# Altium PCB MCORD_AFE.PCBDOC (part 2 of 3)
Units mil, origin at the board's own origin, x right, y up, seen from the top; angles counter-clockwise.
Board outline 2755.91 x 787.4 mil, 4 copper layers (TOP, G1, PWR, BOT), stack 58.685 mil thick; 115 components, 78 nets, 421 pads, 239 vias.
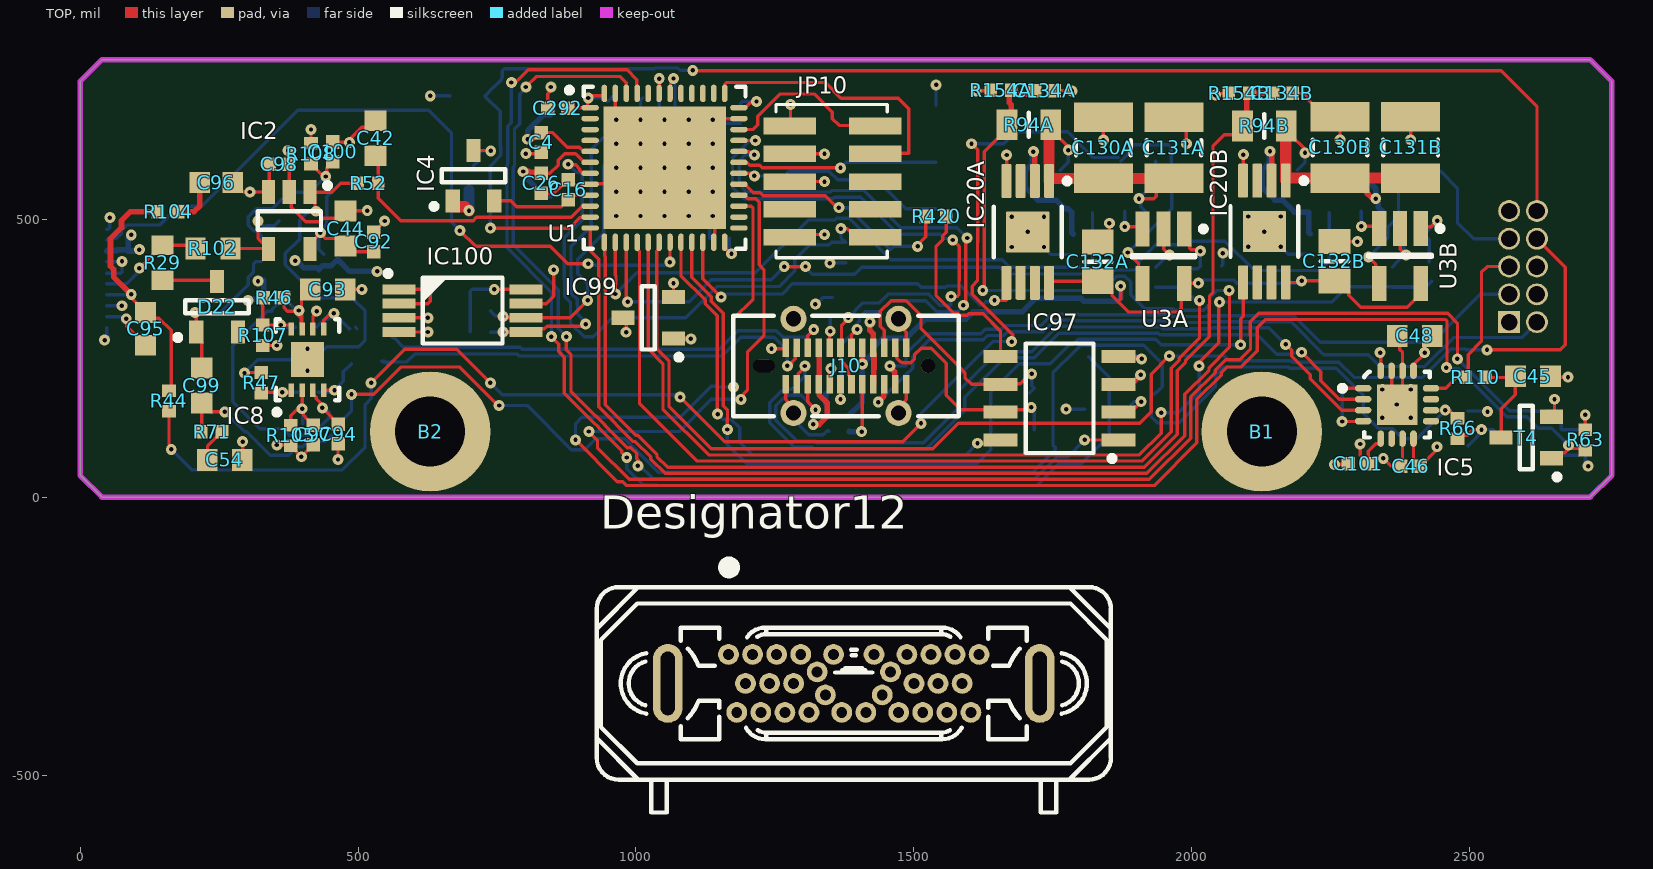
[diagram p0: TOP view]

## Via types
v1: diameter 19.68, hole 7.87, TOP to BOT, tented both sides, 239 vias

## Nets (pads, with @x,y where several pads share a name; then routed paths per layer and width w, separated by ;. In a path a pad name is that pad's centre, name@x,y a point inside that pad or via, vN(x,y) a via of type N, cw(c..) or ccw(c..) an arc to the next point about the centre after c; other vN are vias at no path point) (continued)
CAL0_N: (continued)
  TOP w6: J10.A10@1309.06,203.54 1309.06,172.12 1323,158.17 v1(1323,157.59) ; v1(2169,275) 2179.74,264.26 2179.74,253.4 2213.25,219.89 2213.25,212.91 2269.57,156.59 IC5.3@2308.39,156.59
  BOT w6: v1(1323,157.59) 1297.39,183.2 1270.37,183.2 1251.84,164.67 1251.84,138.48 1289.16,101.16 1321.76,101.16 1325.02,97.91 1517.39,97.91 1580.44,160.95 1580.44,191.47 1650.81,261.84 1712.11,261.84 1758,307.73 1785.9,307.73 1787.4,306.24 1944.01,306.24 1947.09,303.16 2035.06,303.16 2036.52,304.62 2138.66,304.62 2168.28,275 v1(2169,275)
CAL0_P: IC5.2 J10.A11 | length 1424.6
  TOP w6: J10.A11@1289.37,203.54 1292.28,206.45 1292.28,222.13 1303.87,233.72 v1(1303.87,236.12) ; v1(2197.58,260.79) 2232.27,226.11 2232.27,209.45 2265.44,176.27 IC5.2@2308.39,176.27
  BOT w6: v1(1303.87,236.12) 1303.87,218.04 1280.02,194.2 1265.81,194.2 1262.08,190.46 1261.22,190.46 1240.84,170.09 1240.84,133.92 1284.61,90.16 1317.21,90.16 1320.46,86.91 1521.94,86.91 1584.99,149.95 1585.26,149.95 1591.7,156.4 1591.7,179.41 1663.13,250.84 1716.67,250.84 1761.07,295.24 1939.45,295.24 1942.53,292.16 2117.59,292.16 2152.59,257.16 2176.39,257.16 2178.74,259.51 2196.3,259.51 v1(2197.58,260.79)
CAL_IN: IC5.12 J2.5 R110.2 | length 325.1
  TOP w6: IC5.12@2430.44,195.96 2457.06,195.96 2475,213.9 2490.36,213.9 R110.2@2491.9,215.43 2497.21,220.75 2497.21,256.32 2521.18,280.29 2521.18,404.87 2531.28,414.96 J2.5@2571,414.96
CAN_H: D121.1 IC97.7 J10.B11 | length 388.6
  TOP w6: J10.B11@1466.54,268.9 1469.44,265.99 1469.44,250.31 1471.32,248.44 1476.59,243.17 1478.18,243.17 1479.54,241.81 1494.49,241.81 1501.13,248.44 1501.13,256.2 1512.92,267.99 1531.22,267.99 1558.53,240.68 1558.53,183.13 1584.28,157.38 1655.84,157.38 1703.21,157.38 1704.94,159.11 1705.18,159.11 v1@1706.91,157.38
  BOT w6: D121.1@1716.86,120.95 1716.86,152.42
  other v1: 1711.26,161.73
CAN_L: D121.2 IC97.6 J10.B10 | length 476.5
  TOP w6: J10.B10@1446.85,268.9 1446.85,300.32 1439.82,307.35 1439.82,334.38 1458.93,353.49 1485.95,353.49 1512.92,326.52 1512.92,303.26 1570.53,245.65 1570.53,245.6 1581.57,234.56 1581.62,234.56 1592,224.18 1592,214.85 1603.81,203.03 IC97.6@1655.84,203.03 1656.65,203.84 1691.84,203.84 1710,222 v1(1712,222)
  BOT w6: D121.2@1708.05,186.94 D121.2@1716.86,195.75 1712,200.61 v1@1712,220
CAN_MOD: IC97.8 U1.20 | length 902.2
  TOP w6: U1.20@1081.05,458.71 1081.05,398.29 1124.46,354.88 1124.46,348.19 1146.35,326.3 1146.35,150.07 v1(1146.94,149.48) ; v1(1614.5,97.11) 1649.92,97.11 IC97.8@1655.84,103.03
  BOT w6: v1(1146.94,149.48) 1147.34,149.48 1157.1,139.71 1171.88,139.71 1186.81,124.78 1186.81,99.12 1210.03,75.91 1593.3,75.91 v1(1614.5,97.11)
CAN_MOD2: R420.2 U1.29 | length 432.9
  TOP w6: U1.29@1185.38,563.04 1196.2,563.04 1211.24,548 1223.32,548 1229.25,542.08 1340.59,542.08 1362.08,520.59 1364.59,520.59 v1(1365,521) ; v1(1506.86,451.43) 1506.86,453.93 1521.5,468.56 R420.2@1521.5,505.06
  BOT w6: v1(1365,521) 1381.97,521 1457.71,445.26 1463.87,451.43 v1(1506.86,451.43)
CAN_RX: R416.2 U1.45 | length 2128.8
  TOP w6: v1(776,746) 778.62,748.62 785.97,748.62 806.2,768.84 984.09,768.84 1001.57,751.36 1001.57,727.16 U1.45@1002.31,726.43 ; v1(848,289) 848,288.13 860.89,275.24 860.89,262.13 871.16,251.86 871.16,186.91 922.11,135.95 922.74,135.95 933.2,125.5 933.2,124.87 974.52,83.54 974.52,80.31 v1(983.49,71.34)
  BOT w6: v1@778.65,742.32 776,739.68 776,674 769.63,667.62 769.63,599.42 768.16,597.95 768.16,448.36 848,368.52 v1(848,289) ; v1(983.49,71.34) 983.49,51.35 1012.85,22 1036.6,22 1037.6,21 1721.28,21 1760.47,60.19 1801.19,60.19 1851.79,110.79 1851.79,156.21 ; R416.2@1814.79,253.03 1814.79,252.24 1823.2,243.83 1823.99,243.83 1851.79,216.02 1851.79,156.21 ; 1852,156 1851.79,156.21
CAN_TX: IC97.1 U1.46 | length 1914.1
  TOP w6: v1(802,738) 820.84,756.84 971.57,756.84 982.62,745.79 U1.46@982.62,726.43 ; v1(874.75,289) 874.75,265.24 883.16,256.83 883.16,190.46 926.67,146.95 927.3,146.95 944.2,130.06 944.2,129.42 984.44,89.19 990.88,89.19 1001.34,78.73 1001.34,69.06 1009,61.39 1004.12,56.51 v1(1003.57,56.51) ; v1(1807.42,103.03) IC97.1@1868.44,103.03
  BOT w6: v1(802,738) 802,736.18 790.76,724.94 790.76,671.78 781.63,662.65 781.63,595.86 779.16,593.39 779.16,454.33 860,373.49 860,303.75 v1(874.75,289) ; v1(1003.57,56.51) 1003.57,60.23 1030.8,33 1717.72,33 1756.91,72.19 1776.57,72.19 v1(1807.42,103.03)
DC_LEVEL_MEAS0: C42.2 R52.1 U1.10 | length 486.8
  TOP w6: C42.2@534,615 536.5,612.5 R52.1@536.5,564.82 536.5,538.13 577.16,497.47 690.69,497.47 ; 690.72,497.44 707.06,497.44 713.09,503.47 883.2,503.47 903.4,523.67 U1.10@917.66,523.67
DC_LEVEL_MEAS1: C43.2 J2.10 U1.11 | length 2584.6
  TOP w6: v1(738,484) 880.7,484 899.95,503.25 916.93,503.25 U1.11@917.66,503.98 ; v1(1102.25,768) 1102.95,767.3 2556.7,767.3 2621,703 J2.10@2621,514.96
  BOT w6: v1(738,484) 738,595.78 756.11,613.89 756.11,615.3 756.63,615.82 756.63,630.6 756.11,631.12 756.11,693.95 745.25,704.82 744.26,704.82 728.56,720.52 C43.2@728.56,721.5 728.56,722.49 744.26,738.19 745.25,738.19 758.16,751.1 758.16,753.39 759.69,754.92 759.69,767.26 763.26,770.84 1033.19,770.84 1034.45,772.1 1075.49,772.1 1079.59,768 v1(1102.25,768)
DET_OUT0_N: J10.B3 R103.2 | length 854.2
  TOP w6: J10.B3@1309.06,268.9 1309.06,290.65 1316.09,297.68 v1@1316.09,307.35
  BOT w6: R103.2@547.19,304.22 R103.2@547.38,304.4 ; R103.2@548.14,303.26 548.14,301.29 562.86,286.58 564.83,286.58 581.82,269.58 791.83,269.58 795.42,266 1149.69,266 1183.43,299.74 1252.25,299.74 1263.74,288.24 1306.46,288.24 1319.69,301.47 v1(1319.88,301.47)
DET_OUT0_P: J10.B2 R48.2 | length 842.7
  TOP w6: v1(1272.5,236.32) 1278.18,236.32 1280.73,238.87 1280.73,243.17 1286.46,248.9 1286.46,265.99 J10.B2@1289.37,268.9
  BOT w6: R48.2@551.31,240.17 R48.2@548.14,243.34 ; v1(1272.5,236.32) 1272.5,263.93 1248.69,287.74 1188.4,287.74 1154.66,254 790.45,254 786.86,257.58 602.29,257.58 588.05,243.34 R48.2@548.14,243.34 ; R48.2@548.14,243.34 543.57,243.34 542.53,244.38 547.11,244.38 R48.2@548.14,243.34
DET_OUT1_N: J2.2 J10.A3 | length 1364.9
  TOP w10: v1(1436.02,170.97) 1436.02,171.75 1445.94,181.67 1445.94,202.64 J10.A3@1446.85,203.54
  BOT w6: v1(1436.02,170.97) 1489.17,224.12 1490.28,224.12 1497.81,231.65 1497.81,252.88 1528.09,283.16 1624.95,283.16 1632.79,291 1661.77,291 1668.61,297.84 1732.56,297.84 1753.45,318.73 1790.46,318.73 1791.95,317.24 1957.56,317.24 1960.64,314.16 2030.5,314.16 2031.96,315.62 2178.57,315.62 2237.81,256.38 2317.39,256.38 2338.56,235.2 2419.41,235.2 2471.49,287.28 2594,287.28 2621,314.28 J2.2@2621,314.96
DET_OUT1_P: J2.3 J10.A2 | length 1259.6
  TOP w10: v1(1456.99,236.12) 1456.99,234.06 1465.63,225.42 1465.63,204.45 J10.A2@1466.54,203.54
  BOT w6: v1(1456.99,236.12) 1485.31,236.12 1485.81,236.62 1485.81,257.85 1522.12,294.16 1620.39,294.16 1628.23,302 1657.21,302 1664.05,308.84 1728,308.84 1748.89,329.73 1795.02,329.73 1796.51,328.24 1962.12,328.24 1965.19,325.16 2025.95,325.16 2027.41,326.62 2183.13,326.62 2230.75,279 2433.03,279 2518.99,364.96 J2.3@2571,364.96
EN_CAL_PULSE0: R67.1 T5.1 U1.28 | length 2866.7
  TOP w6: v1@917,116 930.83,102.17 930.83,88.83 987.66,32 1923.96,32 1998.24,106.29 1998.24,180.37 2042.08,224.2 2042.08,228.08 2061.46,247.46 2086.46,247.46 2105.84,266.85 2105.84,290.7 2105.27,291.27 2105.27,315.62 2120.5,330.85 2460.3,330.85 2478,313.15 v1(2478,248.9) ; U1.28@1185.38,543.35 1195.29,543.35 1201.64,537 1215.59,537 1221.76,530.83 1221.76,417.78 1230.32,409.22 1230.32,290.43 1200.68,260.79 1200.68,192.65 1193.84,185.81
  BOT w6: v1(915.35,118.11) v1@915.35,119.22 ; v1@917.11,118.11 1077.86,118.11 1135.75,176 v1(1189,176) ; v1(2478,248.9) 2478,248.79 2571.01,155.78 2607.02,155.78 2608.23,154.57 2637.45,154.57 T5.1@2647.25,144.78 2655.12,144.78 2664.92,134.98 2664.92,122.32 2665.7,121.54 R67.1@2708.21,121.54
EN_CAL_PULSE1: R63.1 T4.1 U1.27 | length 2935.5
  TOP w6: v1(891.4,103.03) 966.76,27.67 976.44,27.67 983.11,21 1932.63,21 2009.24,97.61 2009.24,175.81 2053.08,219.65 2053.08,223.52 2063.93,234.38 2088.93,234.38 2117.95,263.4 2117.95,304.62 2133.18,319.85 2455.75,319.85 2459.26,316.33 2459.26,234.26 v1(2458,233) ; v1(1175.19,198.14) 1175.19,320.87 1210.76,356.43 1210.76,520.15 1207.24,523.67 U1.27@1185.38,523.67 ; T4.1@2647.25,69.97 2657.04,79.77 2671.03,79.77 2678.74,87.48 2705.26,87.48 R63.1@2708.21,84.53
  BOT w6: v1(891.4,103.03) 891.4,132.31 902.97,143.88 1080.16,143.88 1135.67,199.4 1146.35,199.4 1147.61,198.14 v1(1175.19,198.14) ; v1(2458,233) 2459.94,231.06 2480.17,231.06 2566.46,144.78 2602.47,144.78 2623.26,123.98 2647.69,123.98 v1(2678.16,93.51)
EN_HV0: IC20A.5 U1.22 | length 700.5
  TOP w6: U1.22@1120.42,458.71 1120.42,393.02 v1(1153.3,360.14) ; v1(1645.17,354) 1657.85,354 ; IC20A.5@1666.57,385.73 1666.79,385.51 IC20A.5@1666.79,362.94 ; 1657.85,354 1666.57,354 1666.79,354 IC20A.5@1666.79,362.94 ; 1657.85,354 IC20A.5@1666.79,362.94
  BOT w6: v1(1153.3,360.14) 1157,360.14 1162.35,365.49 1263,365.49 1281.36,383.85 1506.6,383.85 1512.96,377.49 1556.84,377.49 1559.2,379.84 1585.08,379.84 1618.45,346.47 1624.45,346.47 1629.36,351.38 1642.55,351.38 v1(1645.17,354)
EN_HV1: IC20B.5 U1.21 | length 1599
  TOP w6: U1.21@1100.73,458.71 1100.73,395.74 1135.46,361.01 1135.46,352.75 1157.35,330.86 1157.35,164.3 1164.78,156.87 1164.78,142.09 1164.49,141.8 v1(1164.49,121.87) ; v1(2088,274.24) 2088,321.27 2092.36,325.63 IC20B.5@2092.36,386.36
  BOT w6: v1(1164.49,121.87) 1164.49,94.79 1198.28,61 1613.81,61 1638.16,85.35 1638.16,188.39 1689.61,239.84 1745.13,239.84 1780.59,275.3 1786.56,275.3 1795.5,284.24 1934.9,284.24 1944.9,274.24 v1(2088,274.24)